# Altium PCB FLAN0.PCBDOC
Units mm, origin at the board's own origin, x right, y up, seen from the top; angles counter-clockwise.
Board outline 445.5 x 217 mm, 2 copper layers (Top Layer, Bottom Layer), stack 1.62 mm thick; 11 components, 0 nets, 16 pads, 0 vias.
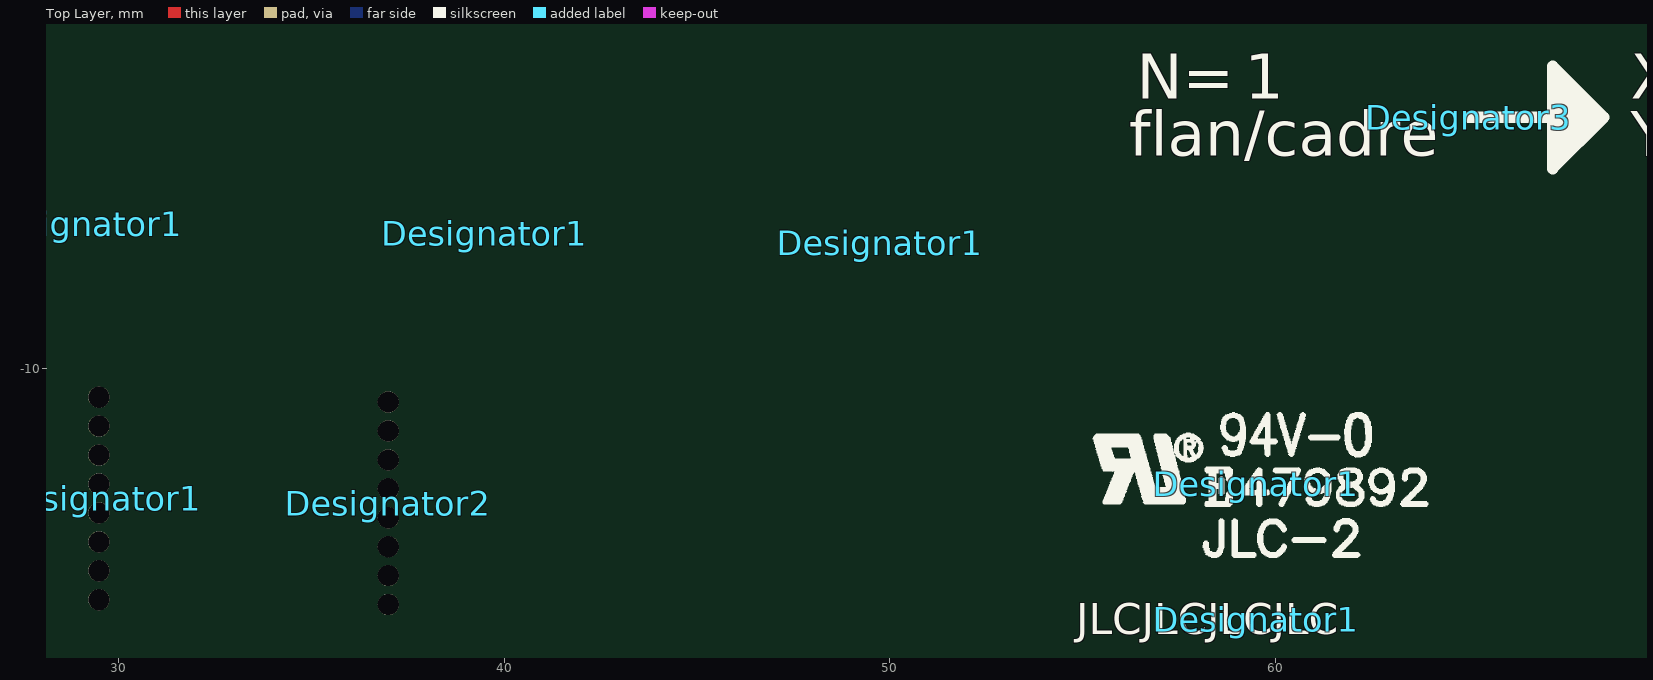
[diagram p0: Top Layer view]
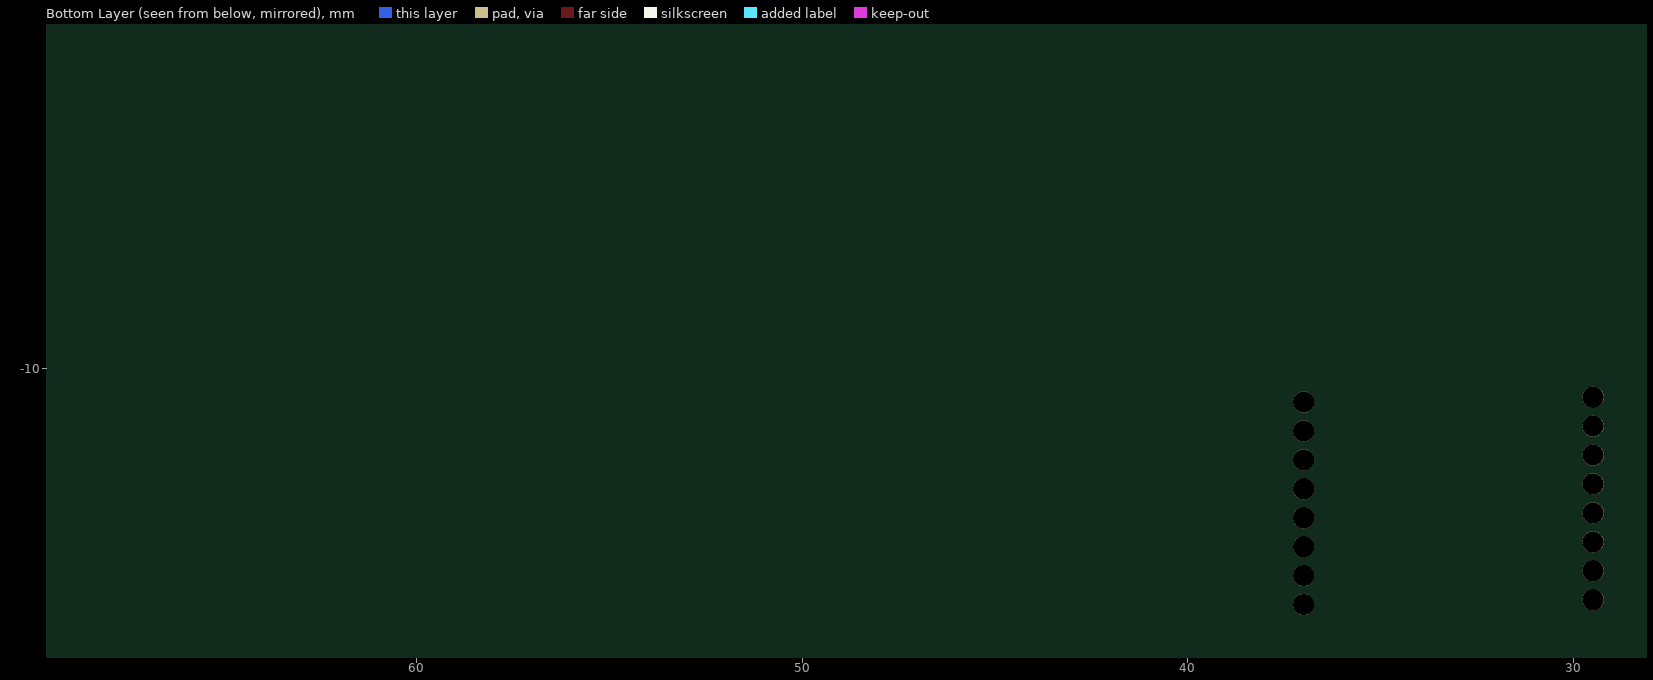
[diagram p1: Bottom Layer view, seen from below]

## Layer stack, top to bottom
Top Solder: solder mask 0.18, Solder Resist, Dk 3.5
Top Layer: signal copper 0.035
Dielectric 1: dielectric 1.55, FR-4, Dk 4.8
Bottom Layer: signal copper 0.035
Bottom Solder: solder mask 0.18, Solder Resist, Dk 3.5

## Board outline
-327.5,-34.5 118,-34.5 118,182.5 -327.5,182.5

## Design rules (kind name [scope] priority, off if disabled: settings)
Clearance Clearance_Polygon [IsRegion] p1: gap=0.4 ignorepadtopadclearanceinfootprint=FALSE
Clearance Clearance_Keep-Out [OnLayer('Keep-Out Layer')] p2: gap=0.254 ignorepadtopadclearanceinfootprint=FALSE
Clearance Clearance_All [All] p3: gap=0.21 ignorepadtopadclearanceinfootprint=FALSE
Height [All] p1: minheight=0 maxheight=100 prefheight=12.7
HoleSize [All] p1: absolutevalues=TRUE maxlimit=10 minlimit=0.025 maxpercent=80.000 minpercent=20.000
HoleToHoleClearance HoleToHoleClearance_NTPH [(PadIsPlated = 'False') vs (PadIsPlated = 'False')] p1: gap=0.15 allowstackedmicrovias=TRUE
HoleToHoleClearance [All] p2: gap=0.254 allowstackedmicrovias=TRUE
MinimumAnnularRing "Minimum IAR  >0.45mm" [((ObjectKind = 'Pad') OR (ObjectKind = 'Via')) And (Layer = 'MultiLayer') And (HoleDiameter > AsMM(0.45))] p1: minimumring=0.125 // minimum inner annular ring for pads > 0.45mm finished hole size
MinimumAnnularRing "Minimum IAR <=0.45mm" [((ObjectKind = 'Pad') OR (ObjectKind = 'Via')) And (Layer = 'MultiLayer') And (HoleDiameter <= AsMM(0.45))] p2: minimumring=0.125 // minimum inner annular ring for pads <= 0.45mm finished hole size
MinimumSolderMaskSliver [All] p1: minsoldermaskwidth=0
PasteMaskExpansion [All] p1: expansion=0.125
PlaneClearance [All] p1: clearance=0
PlaneConnect [All] p1: planeconnectstyle=Direct reliefexpansion=0.508 reliefentries=4 reliefconductorwidth=0.254 reliefairgap=0.254
PolygonConnect [All] p1: connectstyle=Direct reliefconductorwidth=0.254 reliefentries=4 polygonreliefangle="90 Angle" airgapwidth=0.254
RoutingCorners [All] p1: cornerstyle=45-Degree minsetback=0.127 maxsetback=0.127
RoutingPriority [All] p1: routingpriority=1
RoutingVias [All] p1: holewidth=0.35 width=0.75 viastyle="Through Hole" minholewidth=0.25 minwidth=0.6 maxholewidth=0.5 maxwidth=1.1
SMDNeckDown [All] p1: percent=100.000
ShortCircuit ShortCircuit_CutoutRegion_NPTH [(ObjectKind = 'Region') And (Layer = 'MultiLayer') And (IsCutoutRegion = 'False') vs (ObjectKind = 'Pad') And (Layer = 'MultiLayer') And (PadIsPlated = 'False')] p1: allowed=TRUE
SilkToSilkClearance [All] p1: silktosilkclearance=0.2
SilkToSolderMaskClearance [IsPad] p1: minsilkscreentomaskgap=0.2 clearancetoexposedcopper=TRUE
SolderMaskExpansion [All] p1: expansion=0.102 istentingtop=FALSE
UnRoutedNet [All] p1: checkbadconnections=TRUE
ViasUnderSMD [All] p1: allowed=FALSE
Width GND-AUX [InNet('GND-AUX')] p1: maxlimit=2.5 minlimit=1.5 preferedwidth=2
Width +ALIM-AUX [InNet('+ALIM-AUX')] p2: maxlimit=1.5 minlimit=1.5 preferedwidth=1.5
Width +ALIM-UP [InNet('+ALIM-UP')] p3: maxlimit=0.48 minlimit=0.3 preferedwidth=0.4
Width 0VF [InNet('0VF')] p4: maxlimit=2 minlimit=1.4 preferedwidth=1.7
Width +ALIM-ECU1 [InNet('+ALIM-ECU1')] p5: maxlimit=2.5 minlimit=1.5 preferedwidth=2
Width AU1 [InNet('AU1')] p6: maxlimit=0.5 minlimit=0.3 preferedwidth=0.3
Width MOT1A [InNet('MOT1A')] p7: maxlimit=2 minlimit=1 preferedwidth=1
Width MOT1B [InNet('MOT1B')] p8: maxlimit=2 minlimit=1 preferedwidth=1
Width +ALIM-ECU [InNet('+ALIM-ECU')] p9: maxlimit=2.5 minlimit=1.5 preferedwidth=2
Width GND-ECU [InNet('GND-ECU')] p10: maxlimit=2.5 minlimit=1.5 preferedwidth=2
Width GND-ECU1 [InNet('GND-ECU1')] p11: maxlimit=0.5 minlimit=0.3 preferedwidth=0.4
Width GND1-IN [InNet('GND1-IN')] p12: maxlimit=2.5 minlimit=1 preferedwidth=2
Width +ALIM1-IN [InNet('+ALIM1-IN')] p13: maxlimit=2.5 minlimit=1.5 preferedwidth=2
Width +COMMUN [InNet('+COMMUN')] p14: maxlimit=1 minlimit=0.5 preferedwidth=0.5
Width GND [InNet('GND')] p15: maxlimit=2 minlimit=0.3 preferedwidth=0.48
Width +5V [InNet('+5V')] p16: maxlimit=2 minlimit=0.3 preferedwidth=0.48 checkconnectedcopper=TRUE
Width All [All] p17: maxlimit=10 minlimit=0.21 preferedwidth=0.3
17 further rules are at their usual default settings.

## Components (designator, comment, footprint, x,y, rotation, side; value= is the part's Value field where it differs from the comment)
Designator1 "LOGO_UL_JLC2" LOGO_UL_JLC2 59.5,-13 r0 top
Designator1 "JLC_ORDER_NUMBER" JLC_ORDER_NUMBER 59.5,-16.5 r0 top
Designator1 "PCB0A13" PCB0A13 29.5,-13.375 r90 top
Designator1 "PCB0Z08" PCB0Z08 3,-5 r0 top locked
Designator1 "PCB0Z06" PCB0Z06 39.5,-6.5 r0 top
Designator1 "PCB0Z05" PCB0Z05 49.75,-6.75 r0 top
Designator1 "PCB0Z04" PCB0Z04 29,-6.25 r0 top
Designator1 "PCB0Z10" PCB0Z10 3,0 r0 top locked
Designator1 "PCB0Z09" PCB0Z09 9,27.5 r0 top locked
Designator2 "PCB0A13" PCB0A13 37,-13.5 r90 top
Designator3 "PCB0D21" PCB0D21 65,-3.5 r0 top

## Footprints (in the part's own frame and the unit in brackets; to place one, negate y for a bottom-side part, rotate by r counter-clockwise, add the part's x,y. Pads: shape width x height; smd on the part's side, far side on the other; paste and mask are expansions set on the pad)
JLC_ORDER_NUMBER [mm] "Numero de commande JLCPCB"
LOGO_UL_JLC2 [mm] "Logo UL pour PCB single/double layer"
  silkscreen extent -4.24,-1.92 4.46,1.86
PCB0A13 [mm] "TIMBRE POSTE"
  round 0.55 hole 0.55 unplated mask+0: NPTH(-2.625,0) NPTH(-1.875,0) NPTH(-1.125,0) NPTH(-0.375,0) NPTH(0.375,0) NPTH(1.125,0) NPTH(1.875,0) NPTH(2.625,0)
PCB0D21 [mm]
  silkscreen extent 0,-1.33 3.5,1.33
PCB0Z04 [mm] "HAUT DU CUIVRE"
PCB0Z05 [mm] "TEST GLUE"
PCB0Z06 [mm] "TEST DE HAUTEUR"
PCB0Z08 [mm] "ZERO DU PCB"
PCB0Z09 [mm]
PCB0Z10 [mm]

## Nets (pads, with @x,y where several pads share a name; then routed paths per layer and width w, separated by ;. In a path a pad name is that pad's centre, name@x,y a point inside that pad or via, vN(x,y) a via of type N, cw(c..) or ccw(c..) an arc to the next point about the centre after c; other vN are vias at no path point)
pads on no net: Designator1.NPTH Designator2.NPTH

## Silkscreen, mask and mechanical layers (free items; w line width, h text height)
1_ContourPCB:
  lines w0.2: 42.5,-10.5 44.5,-10.5 46.5,-12.5 46.5,-14.5 ; 68,-17 68,-13
11_Instruction:
  lines w0.2: -3,0 -2,0 ; 0,-1 0,0 1,0 ; 2,0 3,0
  text "CHECKLIST pour la carte unitaire (ALTIUM.PCBDOC) :" at 25,70.536 h2
  text "- Pas de composant à moins de 4mm du bord de carte (haut et bas) à cause du convoyeur" at 27,68.533 h2
  text "- Pas de mires à moins de 8mm du bord de carte (haut et bas à cause du convoyeur" at 27,66.533 h2
  text "- Teardrops (Tools)" at 27,64.537 h2
  text "- Perçage connecteur vert à 1,4mm" at 27,62.533 h2
  text "- Trous non métal sur couche multilayer, Shape=Hole size, Plated decoché" at 27,60.533 h2
  text "- Traits d'ouverture dans le PCB délimités par par un trait KeepOut superposé" at 27,58.522 h2
  text "- Vias doivent être épargnés: mask expansion: manuel, Top Bottom=0,102, Tented coché" at 27,56.533 h2
  text "- Mire: Quantité 3 diamètre=2,5mm, mask expansion=2,3mm" at 27,54.522 h2
  text "- Des traits de KeepOut doivent superposer tous les traits verts de la couche Mecanique 1 du PCB unitaire" at 27,52.525 h2
  text "- Supprimer les traits de détourage gauche et droite du PCB et bord technique unitaire avant la construction du flan." at 27,50.533 h2
  text "- Vérifier la présence de la référence du PCB avec l'indice" at 27,48.522 h2
  text "- Aucune sérigraphie sur les Pads" at 27,46.533 h2
  text "CHECKLIST pour le flan (FLAN.PCBDOC) :" at 25,40.536 h2
  text "- Pas de composant à moins de 4mm du bord de carte (haut et bas) à cause du convoyeur" at 27,38.533 h2
  text "- Pas de mires à moins de 8mm du bord de carte (haut et bas à cause du convoyeur" at 27,36.533 h2
  text "- Teardrops (Tools)" at 27,34.537 h2
  text "- Perçage connecteur vert à 1,4mm" at 27,32.533 h2
  text "- Trous non métal sur couche multilayer, Shape=Hole size, Plated decoché" at 27,30.533 h2
  text "- Vias doivent être épargnés: mask expansion: manuel, Top Bottom=0,102, Tented coché" at 27,28.533 h2
  text "- Mire : Quantité 3 diamètre=2,5mm, mask expansion=2,3mm" at 27,26.522 h2
  text "- Vérifier la présence de la référence du PCB avec l'indice" at 27,24.522 h2
  text "- Noter sur un post-it les dimensions du flan et la référence" at 27,22.522 h2
  text "- Position le Zéro du flan sur le zéro MY100 : à 3mm en X et 5mm en Y du coin bas droite du flan" at 27,20.357 h2
  text "- Position du \"XmaxYmax\" sur le coin haut gauche du flan" at 27,18.536 h2
  text "- Position du \"Test hauteur MY100\" et Test Glue MY100\" sur le flan mais pas sur un composant" at 27,16.525 h2
  text "- Aucune sérigraphie sur les Pads" at 27,14.533 h2
  text "- Longueur utile cadre: 360mm. Voir pour mettre timbre poste pour casser le flan en 2" at 27,12.536 h2
  text "- Largueur utile cadre : 110mm pour pouvoir positionner 2 flans (1 en haut et 1 en bas)" at 27,10.536 h2
  text "Limite hauteur bottom pour la vague : test 4.4mm de dépassement : ok" at 27,8.533 h2
  text "- Casser les angles du flan : 2mm x 2mm x 45°" at 27,6.036 h2
  text "zero MY100" at 0.5,-1.882 h2

## Dimensions
68.114,-12.943 to 71.114,-9.943 on 1_ContourPCB

## Text inside footprints (layer, text, board x,y; h text height)
Designator1: 11_Instruction "zero flan PCB" at 3.5,-6.9 h2
Designator1: 11_Instruction "test / hauteur / MY100" at 33.4,-5.1 h2
Designator1: 11_Instruction "test / glue / MY100" at 45.15,-5.35 h2
Designator1: 11_Instruction "Xmax / Ymax" at 25.6,-5.75 h2
Designator1: 11_Instruction "Griffe / depileur" at 1.3,7 h1
Designator1: 11_Instruction "butee" at 13.479,26.979 h1; 11_Instruction "PAS DE / PERCAGE / SUPERIEUR /  /  /  / A 4x4 mm / SUR TOUTE  / LA LIGNE" at 9.4,19.3 h1
Designator1: Top Overlay "JLCJLCJLCJLC" at 54.835,-16.9 h0.8
Designator3: Top Overlay "flan/cadre" at 56.2,-4.878 h2; Top Overlay "Y=" at 69.198,-4.9 h2; Top Overlay "X=" at 69.2,-3.4 h2; Top Overlay "N=" at 56.4,-3.4 h2; Top Overlay "1" at 59.2,-3.4 h2